# Altium PCB cs301_11_ref.PcbDoc
Units mil, origin at the board's own origin, x right, y up, seen from the top; angles counter-clockwise.
Board outline 10825 x 6635 mil, 2 copper layers (Top Layer, Bottom Layer); 128 components, 84 nets, 391 pads, 0 vias.
Unrouted connection lines stored in the file: 249.
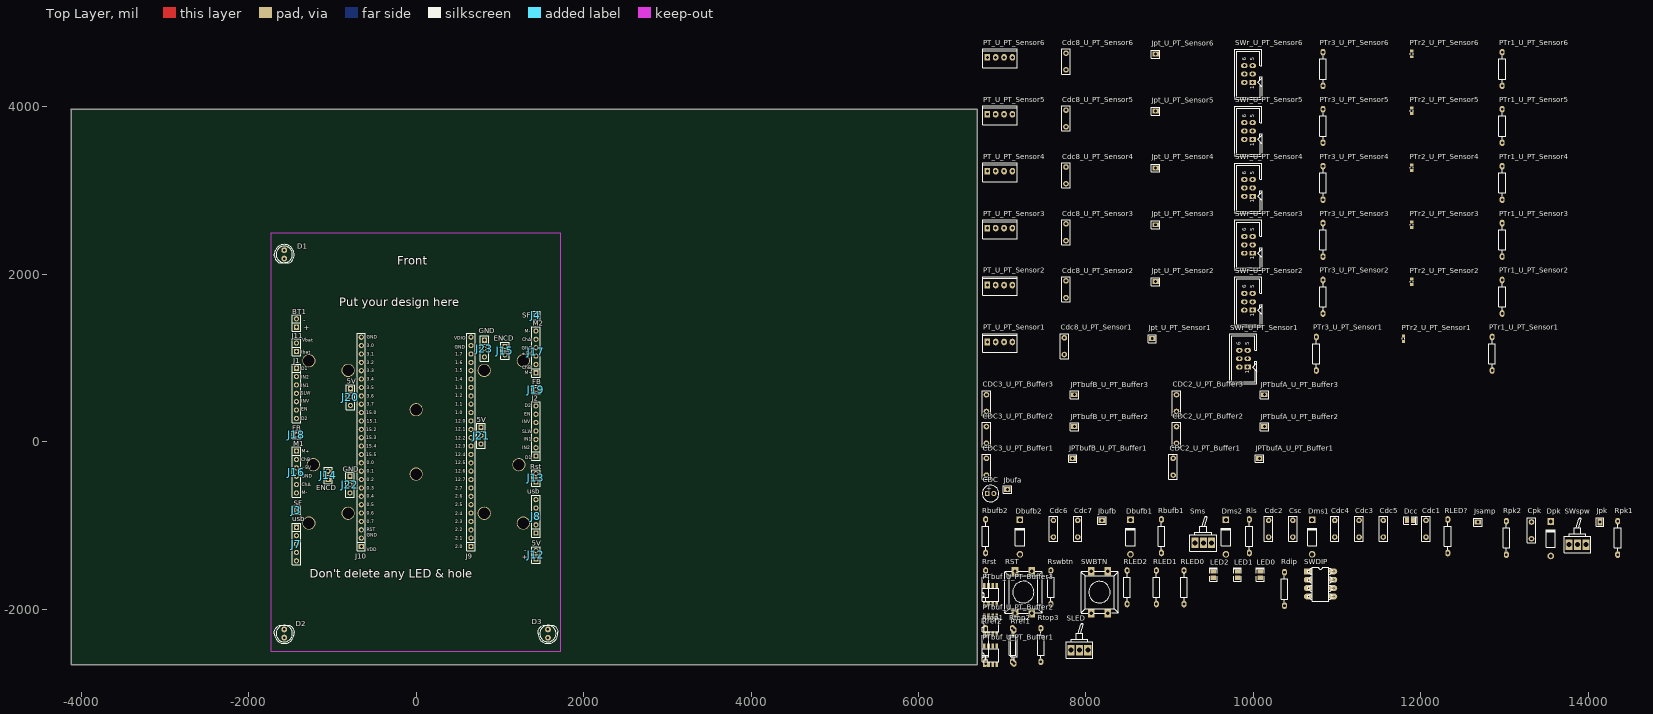
[diagram p0: Top Layer view]
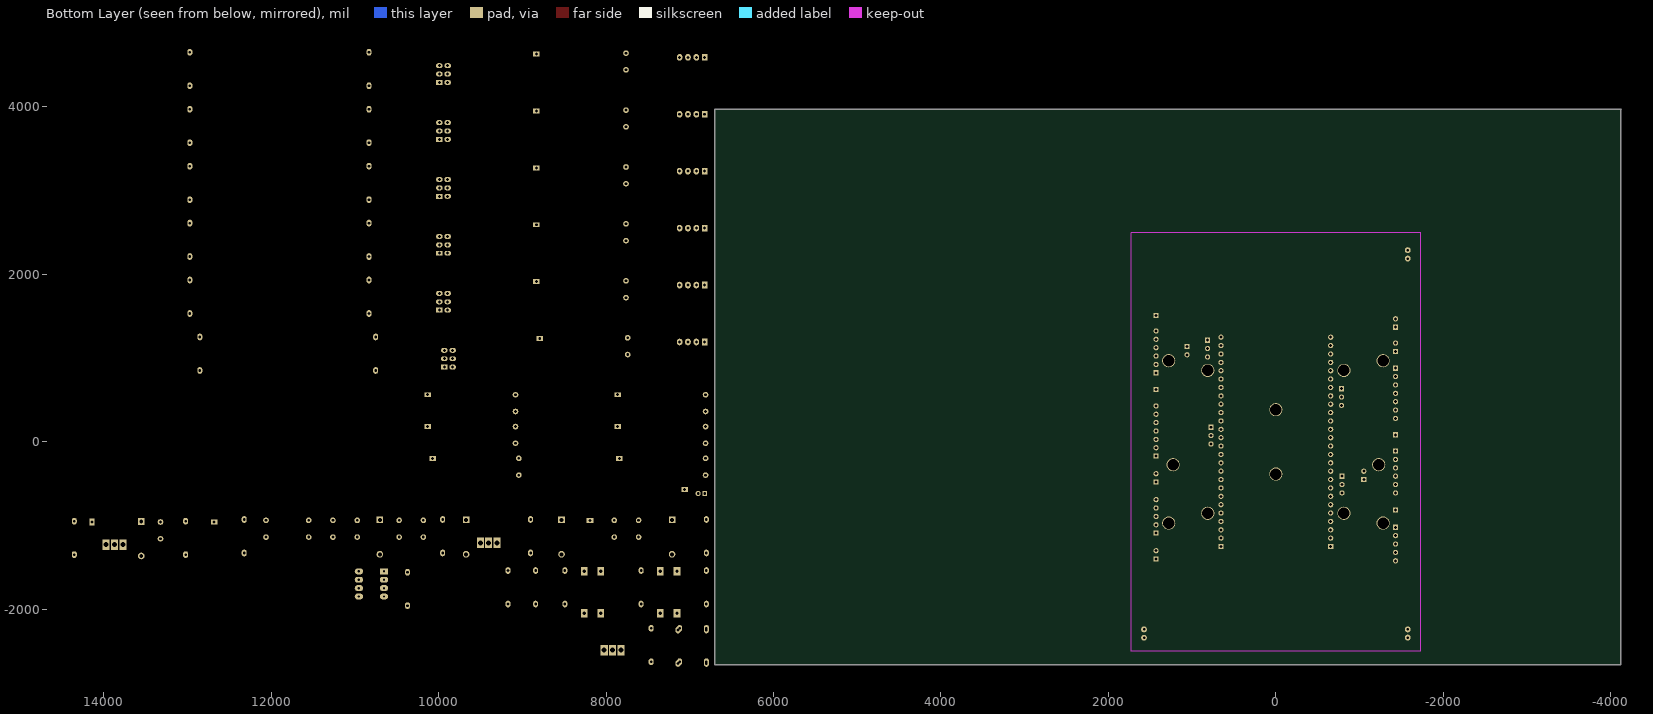
[diagram p1: Bottom Layer view, seen from below]

## Layer stack, top to bottom
Top Solder: solder mask 0.4, Solder Resist, Dk 3.5
Top Layer: signal copper 1.4
Dielectric1: dielectric 12.6, FR-4, Dk 4.8
Bottom Layer: signal copper 1.4
Bottom Solder: solder mask 0.4, Solder Resist, Dk 3.5

## Board outline
-4118.11,-2656.69 -4113.11,-2661.69 6701.89,-2661.69 6701.89,3973.31 -4123.11,3973.31 -4118.11,3968.31 -4118.11,-2656.69

## Design rules (kind name [scope] priority, off if disabled: settings)
Clearance [All] p1: gap=10
PolygonConnect [All] p1: connectstyle=Relief reliefconductorwidth=20 reliefentries=4 polygonreliefangle="90 Angle" airgapwidth=10
RoomDefinition U_Vref_2v5 [InComponentClass('U_Vref_2v5')] p1: confinementstyle=ConfineIn formatcopy=TRUE lockcomponents=FALSE outline 6751.89,-726.69 7311.89,-726.69 7311.89,-406.69 6751.89,-406.69
RoomDefinition U_Sensors [InComponentClass('U_Sensors')] p2: confinementstyle=ConfineIn formatcopy=TRUE lockcomponents=FALSE outline 6741.89,-1416.69 14531.89,-1416.69 14531.89,-776.69 6741.89,-776.69
RoomDefinition U_PT_Sensor6 [InComponentClass('U_PT_Sensor6')] p3: confinementstyle=ConfineIn formatcopy=TRUE lockcomponents=FALSE outline 6751.89,4083.31 13941.89,4083.31 13941.89,4813.31 6751.89,4813.31
RoomDefinition U_PT_Sensor5 [InComponentClass('U_PT_Sensor5')] p4: confinementstyle=ConfineIn formatcopy=TRUE lockcomponents=FALSE outline 6751.89,3403.31 13941.89,3403.31 13941.89,4133.31 6751.89,4133.31
RoomDefinition U_PT_Sensor4 [InComponentClass('U_PT_Sensor4')] p5: confinementstyle=ConfineIn formatcopy=TRUE lockcomponents=FALSE outline 6751.89,2723.31 13941.89,2723.31 13941.89,3453.31 6751.89,3453.31
RoomDefinition U_PT_Sensor3 [InComponentClass('U_PT_Sensor3')] p6: confinementstyle=ConfineIn formatcopy=TRUE lockcomponents=FALSE outline 6751.89,2043.31 13941.89,2043.31 13941.89,2773.31 6751.89,2773.31
RoomDefinition U_PT_Sensor2 [InComponentClass('U_PT_Sensor2')] p7: confinementstyle=ConfineIn formatcopy=TRUE lockcomponents=FALSE outline 6751.89,1363.31 13941.89,1363.31 13941.89,2093.31 6751.89,2093.31
RoomDefinition U_PT_Sensor1 [InComponentClass('U_PT_Sensor1')] p8: confinementstyle=ConfineIn formatcopy=TRUE lockcomponents=FALSE outline 6751.89,683.31 13801.89,683.31 13801.89,1413.31 6751.89,1413.31
RoomDefinition U_PT_Buffer3 [InComponentClass('U_PT_Buffer3')] p9: confinementstyle=ConfineIn formatcopy=TRUE lockcomponents=FALSE outline 6751.89,303.31 11261.89,303.31 11261.89,733.31 6751.89,733.31
RoomDefinition U_PT_Buffer2 [InComponentClass('U_PT_Buffer2')] p10: confinementstyle=ConfineIn formatcopy=TRUE lockcomponents=FALSE outline 6751.89,-76.69 11261.89,-76.69 11261.89,353.31 6751.89,353.31
RoomDefinition U_PT_Buffer1 [InComponentClass('U_PT_Buffer1')] p11: confinementstyle=ConfineIn formatcopy=TRUE lockcomponents=FALSE outline 6751.89,-456.69 11181.89,-456.69 11181.89,-26.69 6751.89,-26.69
RoomDefinition U_Interface [InComponentClass('U_Interface')] p12: confinementstyle=ConfineIn formatcopy=TRUE lockcomponents=FALSE outline 6741.89,-2106.69 11011.89,-2106.69 11011.89,-1386.69 6741.89,-1386.69
RoomDefinition cs301_11 [InComponentClass('cs301_11')] p13: confinementstyle=ConfineIn formatcopy=TRUE lockcomponents=FALSE outline 6741.89,-2676.69 8091.89,-2676.69 8091.89,-2056.69 6741.89,-2056.69
RoutingVias [All] p1: holewidth=28 width=50 viastyle="Through Hole" minholewidth=28 minwidth=50 maxholewidth=28 maxwidth=50
SilkToSolderMaskClearance SilkscreenOverComponentPads [IsPad] p1: minsilkscreentomaskgap=10 clearancetoexposedcopper=TRUE
SolderMaskExpansion [All] p1: expansion=4
UnpouredPolygon [All] p1: allowunpoured=FALSE
Width [All] p1: maxlimit=30 minlimit=10 preferedwidth=10 minimp=50.000000 maximp=50.000000 favimp=50.000000
28 further rules are at their usual default settings.

## Classes and differential pairs
channel class PT_Sensor: U_PT_Sensor1 U_PT_Sensor2 U_PT_Sensor3 U_PT_Sensor4 U_PT_Sensor5 U_PT_Sensor6
channel class PT_Buffer: U_PT_Buffer1 U_PT_Buffer2 U_PT_Buffer3
net class SOB[1..3]: SOB1 SOB2 SOB3
net class SOA[1..3]: SOA1 SOA2 SOA3
net class PTS[1..6]: PTS1 PTS2 PTS3 PTS4 PTS5 PTS6
component class U_Vref_2v5: BUF CDC Jbufa Rref1 Rref2
component class U_Sensors: Cdc1 Cdc2 Cdc3 Cdc4 Cdc5 Cdc6 Cdc7 Cpk Csc Dbufb1 Dbufb2 Dcc Dms1 Dms2 Dpk Jbufb Jpk Jsamp Rbufb1 Rbufb2 RLED? Rls Rpk1 Rpk2 Sms SWspw
component class U_PT_Sensor6: Cdc8_U_PT_Sensor6 Jpt_U_PT_Sensor6 PT_U_PT_Sensor6 PTr1_U_PT_Sensor6 PTr2_U_PT_Sensor6 PTr3_U_PT_Sensor6 SWr_U_PT_Sensor6
component class U_PT_Sensor5: Cdc8_U_PT_Sensor5 Jpt_U_PT_Sensor5 PT_U_PT_Sensor5 PTr1_U_PT_Sensor5 PTr2_U_PT_Sensor5 PTr3_U_PT_Sensor5 SWr_U_PT_Sensor5
component class U_PT_Sensor4: Cdc8_U_PT_Sensor4 Jpt_U_PT_Sensor4 PT_U_PT_Sensor4 PTr1_U_PT_Sensor4 PTr2_U_PT_Sensor4 PTr3_U_PT_Sensor4 SWr_U_PT_Sensor4
component class U_PT_Sensor3: Cdc8_U_PT_Sensor3 Jpt_U_PT_Sensor3 PT_U_PT_Sensor3 PTr1_U_PT_Sensor3 PTr2_U_PT_Sensor3 PTr3_U_PT_Sensor3 SWr_U_PT_Sensor3
component class U_PT_Sensor2: Cdc8_U_PT_Sensor2 Jpt_U_PT_Sensor2 PT_U_PT_Sensor2 PTr1_U_PT_Sensor2 PTr2_U_PT_Sensor2 PTr3_U_PT_Sensor2 SWr_U_PT_Sensor2
component class U_PT_Sensor1: Cdc8_U_PT_Sensor1 Jpt_U_PT_Sensor1 PT_U_PT_Sensor1 PTr1_U_PT_Sensor1 PTr2_U_PT_Sensor1 PTr3_U_PT_Sensor1 SWr_U_PT_Sensor1
component class U_PT_Buffer3: CDC2_U_PT_Buffer3 CDC3_U_PT_Buffer3 JPTbufA_U_PT_Buffer3 JPTbufB_U_PT_Buffer3 PTbuf_U_PT_Buffer3
component class U_PT_Buffer2: CDC2_U_PT_Buffer2 CDC3_U_PT_Buffer2 JPTbufA_U_PT_Buffer2 JPTbufB_U_PT_Buffer2 PTbuf_U_PT_Buffer2
component class U_PT_Buffer1: CDC2_U_PT_Buffer1 CDC3_U_PT_Buffer1 JPTbufA_U_PT_Buffer1 JPTbufB_U_PT_Buffer1 PTbuf_U_PT_Buffer1
component class U_Interface: LED0 LED1 LED2 Rdip RLED0 RLED1 RLED2 Rrst RST Rswbtn SWBTN SWDIP

## Components (designator, comment, footprint, x,y, rotation, side; value= is the part's Value field where it differs from the comment)
BT1 "Battery" SIP2 -1430,1370 r90 top locked
CDC "10uF" ECE-CAPPR2-5X11TH 6821.89,-616.69 r0 top
Cdc1 "47nF" ECE-CAPR0.2x0.1TH 12061.89,-1136.69 r90 top
Cdc2 "47nF" ECE-CAPR0.2x0.1TH 10181.89,-1136.69 r90 top
CDC2_U_PT_Buffer1 "47nF" ECE-CAPR0.2x0.1TH 9041.89,-396.69 r90 top (schematic designator CDC2)
CDC2_U_PT_Buffer2 "47nF" ECE-CAPR0.2x0.1TH 9081.89,-16.69 r90 top (schematic designator CDC2)
CDC2_U_PT_Buffer3 "47nF" ECE-CAPR0.2x0.1TH 9081.89,363.31 r90 top (schematic designator CDC2)
Cdc3 "47nF" ECE-CAPR0.2x0.1TH 11261.89,-1136.69 r90 top
CDC3_U_PT_Buffer1 "47nF" ECE-CAPR0.2x0.1TH 6811.89,-396.69 r90 top (schematic designator CDC3)
CDC3_U_PT_Buffer2 "47nF" ECE-CAPR0.2x0.1TH 6811.89,-16.69 r90 top (schematic designator CDC3)
CDC3_U_PT_Buffer3 "47nF" ECE-CAPR0.2x0.1TH 6811.89,363.31 r90 top (schematic designator CDC3)
Cdc4 "100nF" ECE-CAPR0.2x0.1TH 10971.89,-1136.69 r90 top
Cdc5 "100nF" ECE-CAPR0.2x0.1TH 11551.89,-1136.69 r90 top
Cdc6 "100nF" ECE-CAPR0.2x0.1TH 7611.89,-1136.69 r90 top
Cdc7 "100nF" ECE-CAPR0.2x0.1TH 7901.89,-1136.69 r90 top
Cdc8_U_PT_Sensor1 "47nF" ECE-CAPR0.2x0.1TH 7741.89,1043.31 r90 top (schematic designator Cdc8)
Cdc8_U_PT_Sensor2 "47nF" ECE-CAPR0.2x0.1TH 7761.89,1723.31 r90 top (schematic designator Cdc8)
Cdc8_U_PT_Sensor3 "47nF" ECE-CAPR0.2x0.1TH 7761.89,2403.31 r90 top (schematic designator Cdc8)
Cdc8_U_PT_Sensor4 "47nF" ECE-CAPR0.2x0.1TH 7761.89,3083.31 r90 top (schematic designator Cdc8)
Cdc8_U_PT_Sensor5 "47nF" ECE-CAPR0.2x0.1TH 7761.89,3763.31 r90 top (schematic designator Cdc8)
Cdc8_U_PT_Sensor6 "47nF" ECE-CAPR0.2x0.1TH 7761.89,4443.31 r90 top (schematic designator Cdc8)
Cpk "1uF" ECE-CAPR0.2x0.1TH 13321.89,-1156.69 r90 top
Csc "1uF" ECE-CAPR0.2x0.1TH 10471.89,-1136.69 r90 top
D1 "LED" LED0.1/5MM#1 -1574.8,2189.76 r180 top locked
D2 "LED" LED0.1/5MM#2 -1574.8,-2239.37 r0 top locked
D3 "LED" LED0.1/5MM#1 1574.8,-2239.37 r0 top locked
Dbufb1 "1N4148" ECE-DIO10.46-5.3x2.8TH 8531.89,-1136.69 r90 top
Dbufb2 "1N4148" ECE-DIO10.46-5.3x2.8TH 7211.89,-1136.69 r90 top
Dcc "LTST-C170KAKT" ECE-LED2012-0805SM 11871.89,-936.69 r0 top
Dms1 "1N4148" ECE-DIO10.46-5.3x2.8TH 10701.89,-1136.69 r90 top
Dms2 "1N4148" ECE-DIO10.46-5.3x2.8TH 9671.89,-1136.69 r90 top
Dpk "1N4148" ECE-DIO10.46-5.3x2.8TH 13551.89,-1156.69 r90 top
J1 "CON7" SIP7 -1430,880 r270 top locked
J2 "CON7" SIP7 1430,-170 r90 top locked
J3 "SF" SIP1/0.6 -1430,-815 r270 top locked
J4 "SF" SIP1/0.6 1430,1510 r180 top locked
J7 "usb" SIP5 -1430,-1020 r270 top locked
J8 "usb" SIP5 1430,-1090 r90 top locked
J9 "26PIN" SIP26 655,-1250 r90 top locked
J10 "26PIN" SIP26 -655,-1250 r90 top locked
J11 "Battery" sip2 -1430,1080 r90 top locked
J12 "5V" sip2 1430,-1400 r90 top locked
J13 "Rst" sip2 1430,-480 r90 top locked
J14 "ENCD" sip2 -1050,-450 r90 top locked
J15 "ENCD" sip2 1060,1140 r270 top locked
J16 "M1" sip6 -1430,-110 r270 top locked
J17 "M2" sip6 1430,825 r90 top locked
J18 "FB" SIP1/0.6 -1430,85 r0 top locked
J19 "FB" SIP1/0.6 1430,625 r0 top locked
J20 "5V" sip3 -785,635 r270 top locked
J21 "5V" sip3 775,175 r270 top locked
J22 "GND" sip3 -790,-410 r270 top locked
J23 "GND" sip3 815,1215 r270 top locked
Jbufa "TEST PIN" ECE-HDR1TH 7061.89,-566.69 r90 top
Jbufb "TEST PIN" ECE-HDR1TH 8191.89,-936.69 r90 top
Jpk "TEST PIN" ECE-HDR1TH 14141.89,-956.69 r0 top
Jpt_U_PT_Sensor1 "TEST PIN" ECE-HDR1TH 8791.89,1233.31 r90 top (schematic designator Jpt)
Jpt_U_PT_Sensor2 "TEST PIN" ECE-HDR1TH 8831.89,1913.31 r90 top (schematic designator Jpt)
Jpt_U_PT_Sensor3 "TEST PIN" ECE-HDR1TH 8831.89,2593.31 r90 top (schematic designator Jpt)
Jpt_U_PT_Sensor4 "TEST PIN" ECE-HDR1TH 8831.89,3273.31 r90 top (schematic designator Jpt)
Jpt_U_PT_Sensor5 "TEST PIN" ECE-HDR1TH 8831.89,3953.31 r90 top (schematic designator Jpt)
Jpt_U_PT_Sensor6 "TEST PIN" ECE-HDR1TH 8831.89,4633.31 r90 top (schematic designator Jpt)
JPTbufA_U_PT_Buffer1 "TEST PIN" ECE-HDR1TH 10071.89,-196.69 r90 top (schematic designator JPTbufA)
JPTbufA_U_PT_Buffer2 "TEST PIN" ECE-HDR1TH 10131.89,183.31 r90 top (schematic designator JPTbufA)
JPTbufA_U_PT_Buffer3 "TEST PIN" ECE-HDR1TH 10131.89,563.31 r90 top (schematic designator JPTbufA)
JPTbufB_U_PT_Buffer1 "TEST PIN" ECE-HDR1TH 7841.89,-196.69 r90 top (schematic designator JPTbufB)
JPTbufB_U_PT_Buffer2 "TEST PIN" ECE-HDR1TH 7861.89,183.31 r90 top (schematic designator JPTbufB)
JPTbufB_U_PT_Buffer3 "TEST PIN" ECE-HDR1TH 7861.89,563.31 r90 top (schematic designator JPTbufB)
Jsamp "TEST PIN" ECE-HDR1TH 12681.89,-956.69 r90 top
LED0 "LTST-C170KGKT" ECE-LED2012-0805SM 10081.89,-1586.69 r90 top
LED1 "LTST-C170KAKT" ECE-LED2012-0805SM 9811.89,-1586.69 r90 top
LED2 "LTST-C170KAKT" ECE-LED2012-0805SM 9521.89,-1586.69 r90 top
PT_U_PT_Sensor1 "4 Way" ECE-600104STTH 6821.89,1193.31 r90 top (schematic designator PT)
PT_U_PT_Sensor2 "4 Way" ECE-600104STTH 6821.89,1873.31 r90 top (schematic designator PT)
PT_U_PT_Sensor3 "4 Way" ECE-600104STTH 6821.89,2553.31 r90 top (schematic designator PT)
PT_U_PT_Sensor4 "4 Way" ECE-600104STTH 6821.89,3233.31 r90 top (schematic designator PT)
PT_U_PT_Sensor5 "4 Way" ECE-600104STTH 6821.89,3913.31 r90 top (schematic designator PT)
PT_U_PT_Sensor6 "4 Way" ECE-600104STTH 6821.89,4593.31 r90 top (schematic designator PT)
PTbuf_U_PT_Buffer1 "LT6221" ECE-SO8 6861.89,-2546.69 r90 top (schematic designator PTbuf)
PTbuf_U_PT_Buffer2 "LT6221" ECE-SO8 6861.89,-2186.69 r90 top (schematic designator PTbuf)
PTbuf_U_PT_Buffer3 "LT6221" ECE-SO8 6861.89,-1826.69 r90 top (schematic designator PTbuf)
PTr1_U_PT_Sensor1 "39K" ECE-RESA0.4TH 12851.89,853.31 r90 top (schematic designator PTr1)
PTr1_U_PT_Sensor2 "39K" ECE-RESA0.4TH 12971.89,1533.31 r90 top (schematic designator PTr1)
PTr1_U_PT_Sensor3 "39K" ECE-RESA0.4TH 12971.89,2213.31 r90 top (schematic designator PTr1)
PTr1_U_PT_Sensor4 "39K" ECE-RESA0.4TH 12971.89,2893.31 r90 top (schematic designator PTr1)
PTr1_U_PT_Sensor5 "39K" ECE-RESA0.4TH 12971.89,3573.31 r90 top (schematic designator PTr1)
PTr1_U_PT_Sensor6 "39K" ECE-RESA0.4TH 12971.89,4253.31 r90 top (schematic designator PTr1)
PTr2_U_PT_Sensor1 "10K" ECE-RESC1608-0603SM 11791.89,1233.31 r90 top (schematic designator PTr2)
PTr2_U_PT_Sensor2 "10K" ECE-RESC1608-0603SM 11891.89,1913.31 r90 top (schematic designator PTr2)
PTr2_U_PT_Sensor3 "10K" ECE-RESC1608-0603SM 11891.89,2593.31 r90 top (schematic designator PTr2)
PTr2_U_PT_Sensor4 "10K" ECE-RESC1608-0603SM 11891.89,3273.31 r90 top (schematic designator PTr2)
PTr2_U_PT_Sensor5 "10K" ECE-RESC1608-0603SM 11891.89,3953.31 r90 top (schematic designator PTr2)
PTr2_U_PT_Sensor6 "10K" ECE-RESC1608-0603SM 11891.89,4633.31 r90 top (schematic designator PTr2)
PTr3_U_PT_Sensor1 "27K" ECE-RESA0.4TH 10751.89,853.31 r90 top (schematic designator PTr3)
PTr3_U_PT_Sensor2 "27K" ECE-RESA0.4TH 10831.89,1533.31 r90 top (schematic designator PTr3)
PTr3_U_PT_Sensor3 "27K" ECE-RESA0.4TH 10831.89,2213.31 r90 top (schematic designator PTr3)
PTr3_U_PT_Sensor4 "27K" ECE-RESA0.4TH 10831.89,2893.31 r90 top (schematic designator PTr3)
PTr3_U_PT_Sensor5 "27K" ECE-RESA0.4TH 10831.89,3573.31 r90 top (schematic designator PTr3)
PTr3_U_PT_Sensor6 "27K" ECE-RESA0.4TH 10831.89,4253.31 r90 top (schematic designator PTr3)
Rbufb1 "47K" ECE-RESA0.4TH 8901.89,-1326.69 r90 top
Rbufb2 "56K" ECE-RESA0.4TH 6801.89,-1326.69 r90 top
Rdip "1K" ECE-RESA0.4TH 10371.89,-1956.69 r90 top
RLED0 "270R" ECE-RESA0.4TH 9171.89,-1936.69 r90 top
RLED1 "270R" ECE-RESA0.4TH 8841.89,-1936.69 r90 top
RLED2 "270R" ECE-RESA0.4TH 8491.89,-1936.69 r90 top
RLED? "270R" ECE-RESA0.4TH 12321.89,-1326.69 r90 top
Rls "4K7" ECE-RESA0.4TH 9951.89,-1326.69 r90 top
Rpk1 "220R" ECE-RESA0.4TH 14351.89,-1346.69 r90 top
Rpk2 "220K" ECE-RESA0.4TH 13021.89,-1346.69 r90 top
Rref1 "47K" ECE-RESA0.4TH 7141.89,-2646.69 r90 top
Rref2 "47K" ECE-RESA0.4TH 6801.89,-2646.69 r90 top
Rrst "1K" ECE-RESA0.4TH 6801.89,-1936.69 r90 top
RST "SW-PB" SW-PB 7131.89,-1946.69 r90 top
Rswbtn "1K" ECE-RESA0.4TH 7581.89,-1936.69 r90 top
Rtop1 "270R" ECE-RESA0.4TH 6801.89,-2626.69 r90 top
Rtop2 "270R" ECE-RESA0.4TH 7121.89,-2626.69 r90 top
Rtop3 "270R" ECE-RESA0.4TH 7461.89,-2626.69 r90 top
SLED "SW-SPDT" SW-SPDT 7821.89,-2486.69 r0 top
Sms "SW-SPDT" SW-SPDT 9301.89,-1206.69 r0 top
SWBTN "SW-PB" SW-PB 8041.89,-1946.69 r90 top
SWDIP "*" ECE-DIP8 10651.89,-1546.69 r0 top
SWr_U_PT_Sensor1 "Header 3X2" ECE-BHDR2X3 9931.89,893.31 r90 top (schematic designator SWr)
SWr_U_PT_Sensor2 "Header 3X2" ECE-BHDR2X3 9991.89,1573.31 r90 top (schematic designator SWr)
SWr_U_PT_Sensor3 "Header 3X2" ECE-BHDR2X3 9991.89,2253.31 r90 top (schematic designator SWr)
SWr_U_PT_Sensor4 "Header 3X2" ECE-BHDR2X3 9991.89,2933.31 r90 top (schematic designator SWr)
SWr_U_PT_Sensor5 "Header 3X2" ECE-BHDR2X3 9991.89,3613.31 r90 top (schematic designator SWr)
SWr_U_PT_Sensor6 "Header 3X2" ECE-BHDR2X3 9991.89,4293.31 r90 top (schematic designator SWr)
SWspw "SW-SPDT" SW-SPDT 13771.89,-1226.69 r0 top

## Footprints (in the part's own frame and the unit in brackets; to place one, negate y for a bottom-side part, rotate by r counter-clockwise, add the part's x,y. Pads: shape width x height; smd on the part's side, far side on the other; paste and mask are expansions set on the pad)
ECE-600104STTH [mm] "Polarised Header 4 way"
  rect 2x1.7 hole 0.9: 1(0,0)
  oval 2x1.7 hole 0.9: 2(0,-2.54) 3(0,-5.08) 4(0,-7.62)
  silkscreen extent -3.16,-9.04 2.54,1.42
ECE-BHDR2X3 [mm]
  rect 1.5x2 hole 0.9: 1(0,0)
  oval 1.5x2 hole 0.9 paste+0: 2(0,2.54)
  oval 1.5x2 hole 0.9: 3(2.54,0) 4(2.54,2.54) 5(5.08,0) 6(5.08,2.54)
  silkscreen extent -5.1,-2.82 10.1,5.45
ECE-CAPPR2-5X11TH [mm] "Polarised Radial Cap Dia 5mm"
  rect 1.45x1.6 hole 0.8: 1(0,0)
  oval 1.45x1.6 hole 0.8: 2(2,0)
  silkscreen extent -1.5,-2.5 3.5,2.5, body extent -1.51,-2.51 3.51,2.51, height 11.43
ECE-CAPR0.2x0.1TH [mm] "Radial non polarised Capacitor"
  round 1.7 hole 0.8: 1(0,0) 2(5.08,0)
  silkscreen extent -1.27,-1.27 6.35,1.27
ECE-DIO10.46-5.3x2.8TH [mm] "Diode, Axial; Body 5.2 x 2.7 mm (LxDia. max), Lead Dia. 0.86 mm (max)"
  round 2 hole 1.2: 1(-5.23,0)
  rect 2x2 hole 1.2: 2(5.23,0)
  silkscreen extent -2.65,-1.4 2.75,1.4
ECE-DIP8 [mil]
  rect 100x70 hole 28: 1(0,0)
  oval 100x70 hole 28: 2(0,-100) 3(0,-200) 4(0,-300) 5(300,-300) 6(300,-200) 7(300,-100) 8(300,0)
  silkscreen extent 0,-357 300,50
ECE-HDR1TH [mm] "Test Pin"
  rect 1.5x2 hole 0.9: 1(0,0)
  silkscreen extent -1.25,-1.29 1.15,1.25
ECE-LED2012-0805SM [mm] "RED AS AlGaAs SMD LED, Body; 2mm x 1.25 mm (LxW)"
  rect 1.3x1.6 smd: 1(-0.95,0) 2(0.95,0)
  silkscreen extent -2,-1.15 2.13,1.15
ECE-RESA0.4TH [mil] "Resistor Axial 10mm"
  oval 80x60 hole 31.5: 1(0.16,0.31) 2(400.16,0.31)
  silkscreen extent 40,-40 360,40, body extent -7,-47 417,47, height 95
ECE-RESC1608-0603SM [mm] "Chip Resistor, Body 1.6x0.8mm, IPC Medium Density"
  rect 0.9x1 smd: 1(-0.85,0) 2(0.85,0)
  silkscreen extent -0.2,-0.4 0.2,0.4, body extent -0.85,-0.48 0.85,0.48, height 0.6
ECE-SO8 [mm] "8-Lead Plastic Small Outline, 1.27mm pitch"
  rect 1.5x0.8 smd: 1(-2.8,1.905) 2(-2.8,0.635) 3(-2.8,-0.635) 4(-2.8,-1.9) 5(2.8,-1.905) 6(2.8,-0.635) 7(2.8,0.635) 8(2.8,1.905)
  silkscreen extent -2,-2.5 2,2.5, body extent -3,-2.45 3,2.45, height 1.7
LED0.1/5MM#1 [mil]
  round 70 hole 30: A(0,0) K(0,-100)
  silkscreen extent -118,-168 118,50
LED0.1/5MM#2 [mil]
  round 70 hole 30: A(0,0) K(0,-98.43)
  silkscreen extent -118,-168 118,50
SIP1/0.6 [mil]
  rect 62x62 hole 35.43: 1(0,0)
  silkscreen extent -50,-50 50,50
SIP2 [mil]
  rect 62x62 hole 35.43: 1(0,0)
  round 62 hole 35.43: 2(100,0)
  silkscreen extent -50,-50 150,50
sip2 [mil]
  rect 62x62 hole 35.43: 1(0,0)
  round 62 hole 35.43: 2(100,0)
  silkscreen extent -50,-50 150,50
sip3 [mil]
  rect 62x62 hole 35.43: 1(0,0)
  round 62 hole 35.43: 2(100,0) 3(200,0)
  silkscreen extent -50,-50 250,50
SIP5 [mil]
  rect 62x62 hole 35.43: 1(0,0)
  round 62 hole 35.43: 2(100,0) 3(200,0) 4(300,0) 5(400,0)
  silkscreen extent -50,-50 450,50
sip6 [mil]
  rect 62x62 hole 35.43: 1(0,0)
  round 62 hole 35.43: 2(100,0) 3(200,0) 4(300,0) 5(400,0) 6(500,0)
  silkscreen extent -50,-50 550,50
SIP7 [mil]
  rect 62x62 hole 35.43: 1(0,0)
  round 62 hole 35.43: 2(100,0) 3(200,0) 4(300,0) 5(400,0) 6(500,0) 7(600,0)
  silkscreen extent -50,-50 650,50
SIP26 [mil]
  rect 62x62 hole 35.43: 1(0,0)
  round 62 hole 35.43: 2(100,0) 3(200,0) 4(300,0) 5(400,0) 6(500,0) 7(600,0) 8(700,0) 9(800,0) 10(900,0) 11(1000,0) 12(1100,0) 13(1200,0) 14(1300,0) 15(1400,0) 16(1500,0) 17(1600,0) 18(1700,0) 19(1800,0) 20(1900,0) 21(2000,0) 22(2100,0) 23(2200,0) 24(2300,0) 25(2400,0) 26(2500,0)
  silkscreen extent -50,-50 2550,50
SW-PB [mil]
  rect 100x80 hole 40: 1(-100,-20) 1(400,-20) 2(-100,-220) 2(400,-220)
  silkscreen extent -100,-345 400,100
SW-SPDT [mil]
  rect 85x125 hole 60: 1(0,0) 2(100,0) 3(200,0)
  silkscreen extent -60,-100 260,315

## Part data
BT1 J11 J12 J13 J14 J15: library part CON2, "Connector"
CDC: library part CAP000211, "CAP ELEC 10uF 25V TH"
Cdc1 Cdc2 CDC2_U_PT_Buffer1 CDC2_U_PT_Buffer2 CDC2_U_PT_Buffer3 Cdc3 CDC3_U_PT_Buffer1 CDC3_U_PT_Buffer2 CDC3_U_PT_Buffer3 Cdc8_U_PT_Sensor1 Cdc8_U_PT_Sensor2 Cdc8_U_PT_Sensor3 Cdc8_U_PT_Sensor4 Cdc8_U_PT_Sensor5 Cdc8_U_PT_Sensor6: library part CAP000045, "CAP CER 47nF 50V TH"
Cdc4 Cdc5 Cdc6 Cdc7: library part CAP000125, "CAP MKT 100nF 100V TH"
Cpk Csc: library part CAP000062, "CAP MONO 1uF 50V TH"
Dbufb1 Dbufb2 Dms1 Dms2 Dpk: library part DIO000005, "Small Signal Diode 2A 100V TH"
Dcc LED1 LED2: library part DIO000105, "LED RED ORANGE CLEAR 0805 SMD"
J1 J2: "Connector"
J3 J4 J18 J19: library part CON1, "Connector"
J7 J8: library part CON5, "Connector"
J16 J17: library part CON6, "Connector"
J20 J21 J22 J23: library part CON3, "Connector"
Jbufa Jbufb Jpk Jpt_U_PT_Sensor1 Jpt_U_PT_Sensor2 Jpt_U_PT_Sensor3 Jpt_U_PT_Sensor4 Jpt_U_PT_Sensor5 Jpt_U_PT_Sensor6 JPTbufA_U_PT_Buffer1 JPTbufA_U_PT_Buffer2 JPTbufA_U_PT_Buffer3 JPTbufB_U_PT_Buffer1 JPTbufB_U_PT_Buffer2 JPTbufB_U_PT_Buffer3 Jsamp: library part CON000017
LED0: library part DIO000104, "LED GREEN CLEAR 0805 SM"
PT_U_PT_Sensor1 PT_U_PT_Sensor2 PT_U_PT_Sensor3 PT_U_PT_Sensor4 PT_U_PT_Sensor5 PT_U_PT_Sensor6: library part CON000003, "HEADER POLARISED 4WAY TH"
PTbuf_U_PT_Buffer1 PTbuf_U_PT_Buffer2 PTbuf_U_PT_Buffer3: library part OPA000102, "IC OPAMP LT6221 DUAL SM"
PTr1_U_PT_Sensor1 PTr1_U_PT_Sensor2 PTr1_U_PT_Sensor3 PTr1_U_PT_Sensor4 PTr1_U_PT_Sensor5 PTr1_U_PT_Sensor6: library part RES000056, "RES MF 39K TH"
PTr2_U_PT_Sensor1 PTr2_U_PT_Sensor2 PTr2_U_PT_Sensor3 PTr2_U_PT_Sensor4 PTr2_U_PT_Sensor5 PTr2_U_PT_Sensor6: library part RES000150, "RES CER 10K 1608 SM"
PTr3_U_PT_Sensor1 PTr3_U_PT_Sensor2 PTr3_U_PT_Sensor3 PTr3_U_PT_Sensor4 PTr3_U_PT_Sensor5 PTr3_U_PT_Sensor6: library part RES000054, "RES MF 27K TH"
Rbufb1 Rref1 Rref2: library part RES000057, "RES MF 47K TH"
Rbufb2: library part RES000058, "RES MF 56K TH"
Rdip Rrst Rswbtn: library part RES000037, "RES MF 1K0 TH"
RLED0 RLED1 RLED2 RLED? Rtop1 Rtop2 Rtop3: library part RES000030, "RES MF 270R TH"
Rls: library part RES000045, "RES MF 4K7 TH"
Rpk1: library part RES000029, "RES MF 220R TH"
Rpk2: library part RES000065, "RES MF 220K TH"
RST SWBTN: "Push Button Switch"
SLED Sms SWspw: "Toggle Switch"
SWDIP: library part Switch-DIP8

## Free pads (board coordinates)
  round 157.48 hole 137.8 unplated: 0(-1280,-970) 0(-1280,970) 0(-1228,-272) 0(0,-385) 0(0,385) 0(1228,-272) 0(1280,-970) 0(1280,970) 1(-813,-853) 1(-813,853) 1(813,-853) 1(813,853)

## Nets (pads, with @x,y where several pads share a name; then routed paths per layer and width w, separated by ;. In a path a pad name is that pad's centre, name@x,y a point inside that pad or via, vN(x,y) a via of type N, cw(c..) or ccw(c..) an arc to the next point about the centre after c; other vN are vias at no path point)
AGND: Cdc1.2 Cdc2.2 CDC2_U_PT_Buffer1.2 CDC2_U_PT_Buffer2.2 CDC2_U_PT_Buffer3.2 Cdc3.2 CDC3_U_PT_Buffer1.2 CDC3_U_PT_Buffer2.2 CDC3_U_PT_Buffer3.2 Cdc4.2 Cdc5.2 Cdc6.2 Cdc7.2 Cdc8_U_PT_Sensor1.2 Cdc8_U_PT_Sensor2.2 Cdc8_U_PT_Sensor3.2 Cdc8_U_PT_Sensor4.2 Cdc8_U_PT_Sensor5.2 Cdc8_U_PT_Sensor6.2 CDC.2 Cpk.2 Dbufb2.1 Dcc.2 Dms2.1 J22.1 J23.1 PT_U_PT_Sensor1.2 PT_U_PT_Sensor1.3 PT_U_PT_Sensor1.4 PT_U_PT_Sensor2.2 PT_U_PT_Sensor2.3 PT_U_PT_Sensor2.4 PT_U_PT_Sensor3.2 PT_U_PT_Sensor3.3 PT_U_PT_Sensor3.4 PT_U_PT_Sensor4.2 PT_U_PT_Sensor4.3 PT_U_PT_Sensor4.4 PT_U_PT_Sensor5.2 PT_U_PT_Sensor5.3 PT_U_PT_Sensor5.4 PT_U_PT_Sensor6.2 PT_U_PT_Sensor6.3 PT_U_PT_Sensor6.4 PTbuf_U_PT_Buffer1.4 PTbuf_U_PT_Buffer2.4 PTbuf_U_PT_Buffer3.4 Rbufb2.1 Rpk2.1 Rref2.1 Rtop1.1 Rtop2.1 Rtop3.1 SLED.3 SWspw.3
D11: J1.1 J10.20
D21: J2.1 J10.21
DGND: J1.4 J2.4 J13.1 J22.3 J23.3 Rdip.1 RLED0.1 RLED1.1 RLED2.1 RST.1 SWBTN.1
IAMPIN: Cdc5.1 J10.22 J11.1
IAMPOUT: Cdc4.1 J9.5 J10.18
IN11: J1.3 J10.14
IN12: J1.2 J10.15
IN21: J2.3 J10.12
IN22: J2.2 J10.13
LED0: J9.2 LED0.1
LED1: J9.10 LED1.1
LED2: J9.11 LED2.1
NetBUF_3: Rref1.1 Rref2.2
NetBUF_5: Cdc6.1 Dbufb1.1 Dbufb2.2 Jbufb.1 Rbufb1.1 Rbufb2.2
NetD1_A: D1.A D2.A D3.A SLED.2
NetD1_K: D1.K Rtop1.2
NetD2_K: D2.K Rtop2.2
NetD3_K: D3.K Rtop3.2
NetDcc_1: Dcc.1 RLED?.1
NetLED0_2: LED0.2 RLED0.2
NetLED1_2: LED1.2 RLED1.2
NetLED2_2: LED2.2 RLED2.2
NetPTr1_U_PT_Sensor1_1: PTr1_U_PT_Sensor1.1 SWr_U_PT_Sensor1.2
NetPTr1_U_PT_Sensor2_1: PTr1_U_PT_Sensor2.1 SWr_U_PT_Sensor2.2
NetPTr1_U_PT_Sensor3_1: PTr1_U_PT_Sensor3.1 SWr_U_PT_Sensor3.2
NetPTr1_U_PT_Sensor4_1: PTr1_U_PT_Sensor4.1 SWr_U_PT_Sensor4.2
NetPTr1_U_PT_Sensor5_1: PTr1_U_PT_Sensor5.1 SWr_U_PT_Sensor5.2
NetPTr1_U_PT_Sensor6_1: PTr1_U_PT_Sensor6.1 SWr_U_PT_Sensor6.2
NetPTr2_U_PT_Sensor1_1: PTr2_U_PT_Sensor1.1 SWr_U_PT_Sensor1.6
NetPTr2_U_PT_Sensor2_1: PTr2_U_PT_Sensor2.1 SWr_U_PT_Sensor2.6
NetPTr2_U_PT_Sensor3_1: PTr2_U_PT_Sensor3.1 SWr_U_PT_Sensor3.6
NetPTr2_U_PT_Sensor4_1: PTr2_U_PT_Sensor4.1 SWr_U_PT_Sensor4.6
NetPTr2_U_PT_Sensor5_1: PTr2_U_PT_Sensor5.1 SWr_U_PT_Sensor5.6
NetPTr2_U_PT_Sensor6_1: PTr2_U_PT_Sensor6.1 SWr_U_PT_Sensor6.6
NetPTr3_U_PT_Sensor1_1: PTr3_U_PT_Sensor1.1 SWr_U_PT_Sensor1.4
NetPTr3_U_PT_Sensor2_1: PTr3_U_PT_Sensor2.1 SWr_U_PT_Sensor2.4
NetPTr3_U_PT_Sensor3_1: PTr3_U_PT_Sensor3.1 SWr_U_PT_Sensor3.4
NetPTr3_U_PT_Sensor4_1: PTr3_U_PT_Sensor4.1 SWr_U_PT_Sensor4.4
NetPTr3_U_PT_Sensor5_1: PTr3_U_PT_Sensor5.1 SWr_U_PT_Sensor5.4
NetPTr3_U_PT_Sensor6_1: PTr3_U_PT_Sensor6.1 SWr_U_PT_Sensor6.4
NetRdip_2: Rdip.2 SWDIP.1 SWDIP.2 SWDIP.3 SWDIP.4
NetRls_1: Rls.1 Sms.1
NetRrst_1: Rrst.1 RST.2
NetRswbtn_1: Rswbtn.1 SWBTN.2
PKAMPFB: Cpk.1 Dpk.2 J10.8 Jpk.1 Rpk1.1 Rpk2.2
PKAMPIN: Cdc1.1 Cdc3.1 J9.1 J9.7 J10.11 Jsamp.1
PKAMPOUT: Dpk.1 J10.10
PKDRAIN: J9.12 Rpk1.2
PTS1: Cdc8_U_PT_Sensor1.1 Jpt_U_PT_Sensor1.1 PT_U_PT_Sensor1.1 PTbuf_U_PT_Buffer1.3 SWr_U_PT_Sensor1.1 SWr_U_PT_Sensor1.3 SWr_U_PT_Sensor1.5
PTS2: Cdc8_U_PT_Sensor2.1 Jpt_U_PT_Sensor2.1 PT_U_PT_Sensor2.1 PTbuf_U_PT_Buffer2.3 SWr_U_PT_Sensor2.1 SWr_U_PT_Sensor2.3 SWr_U_PT_Sensor2.5
PTS3: Cdc8_U_PT_Sensor3.1 Jpt_U_PT_Sensor3.1 PT_U_PT_Sensor3.1 PTbuf_U_PT_Buffer3.3 SWr_U_PT_Sensor3.1 SWr_U_PT_Sensor3.3 SWr_U_PT_Sensor3.5
PTS4: Cdc8_U_PT_Sensor4.1 Jpt_U_PT_Sensor4.1 PT_U_PT_Sensor4.1 PTbuf_U_PT_Buffer1.5 SWr_U_PT_Sensor4.1 SWr_U_PT_Sensor4.3 SWr_U_PT_Sensor4.5
PTS5: Cdc8_U_PT_Sensor5.1 Jpt_U_PT_Sensor5.1 PT_U_PT_Sensor5.1 PTbuf_U_PT_Buffer2.5 SWr_U_PT_Sensor5.1 SWr_U_PT_Sensor5.3 SWr_U_PT_Sensor5.5
PTS6: Cdc8_U_PT_Sensor6.1 Jpt_U_PT_Sensor6.1 PT_U_PT_Sensor6.1 PTbuf_U_PT_Buffer3.5 SWr_U_PT_Sensor6.1 SWr_U_PT_Sensor6.3 SWr_U_PT_Sensor6.5
Q1A: J10.9 J14.1
Q1B: J10.23 J14.2
Q2A: J10.4 J15.1
Q2B: J10.5 J15.2
RESET: J10.3 J13.2 Rrst.2
SAMPIN: Cdc2.1 Csc.2 Dms1.1 Dms2.2 J9.4 Rls.2
SAR0: Cdc7.1 J9.6
SAR3: Csc.1 J9.8 J10.19
SOA1: CDC2_U_PT_Buffer1.1 J9.23 JPTbufA_U_PT_Buffer1.1 PTbuf_U_PT_Buffer1.1 PTbuf_U_PT_Buffer1.2
SOA2: CDC2_U_PT_Buffer2.1 J9.24 JPTbufA_U_PT_Buffer2.1 PTbuf_U_PT_Buffer2.1 PTbuf_U_PT_Buffer2.2
SOA3: CDC2_U_PT_Buffer3.1 J10.17 JPTbufA_U_PT_Buffer3.1 PTbuf_U_PT_Buffer3.1 PTbuf_U_PT_Buffer3.2
SOB1: CDC3_U_PT_Buffer1.1 J10.16 JPTbufB_U_PT_Buffer1.1 PTbuf_U_PT_Buffer1.6 PTbuf_U_PT_Buffer1.7
SOB2: CDC3_U_PT_Buffer2.1 J10.25 JPTbufB_U_PT_Buffer2.1 PTbuf_U_PT_Buffer2.6 PTbuf_U_PT_Buffer2.7
SOB3: CDC3_U_PT_Buffer3.1 J10.24 JPTbufB_U_PT_Buffer3.1 PTbuf_U_PT_Buffer3.6 PTbuf_U_PT_Buffer3.7
SWBTN: J9.3 Rswbtn.2
SWDIP0: J9.16 SWDIP.8
SWDIP1: J9.15 SWDIP.7
SWDIP2: J9.14 SWDIP.6
SWDIP3: J9.13 SWDIP.5
VBAT: J11.2 Rbufb1.2
VCC: PTbuf_U_PT_Buffer1.8 PTbuf_U_PT_Buffer2.8 PTbuf_U_PT_Buffer3.8
VCC1: J2.5 J2.6 J2.7 J21.1
VCC2: J21.2 SWspw.1
VCC3: J21.3 SLED.1
VCC4: J20.1 Rref1.2
VCC5: J1.5 J1.6 J1.7 J20.2
VCC6: J20.3
VCC_S: Dbufb1.2 Dms1.2 PTr1_U_PT_Sensor1.2 PTr1_U_PT_Sensor2.2 PTr1_U_PT_Sensor3.2 PTr1_U_PT_Sensor4.2 PTr1_U_PT_Sensor5.2 PTr1_U_PT_Sensor6.2 PTr2_U_PT_Sensor1.2 PTr2_U_PT_Sensor2.2 PTr2_U_PT_Sensor3.2 PTr2_U_PT_Sensor4.2 PTr2_U_PT_Sensor5.2 PTr2_U_PT_Sensor6.2 PTr3_U_PT_Sensor1.2 PTr3_U_PT_Sensor2.2 PTr3_U_PT_Sensor3.2 PTr3_U_PT_Sensor4.2 PTr3_U_PT_Sensor5.2 PTr3_U_PT_Sensor6.2 RLED?.2 SWspw.2
VREF: CDC.1 J10.6 J10.7 Jbufa.1 Sms.2
pads on no net: BT1.1 BT1.2 J3.1 J4.1 J7.1 J7.2 J7.3 J7.4 J7.5 J8.1 J8.2 J8.3 J8.4 J8.5 J9.9 J9.17 J9.18 J9.19 J9.20 J9.21 J9.22 J9.25 J9.26 J10.1 J10.2 J10.26 J12.1 J12.2 J16.1 J16.2 J16.3 J16.4 J16.5 J16.6 J17.1 J17.2 J17.3 J17.4 J17.5 J17.6 J18.1 J19.1 J22.2 J23.2 Sms.3

## Keep-outs
Keep-Out Layer:
  lines w10: -1730,-2500 -1730,2500 1730,2500 1730,-2500 -1730,-2500

## Silkscreen, mask and mechanical layers (free items; w line width, h text height)
Top Overlay:
  text "Front" at -228.11,2113.31 h100
  text "Put your design here" at -920,1620 h100
  text "-" at -1350,1430 h60
  text "+" at -1345,1335 h60
  text "M-" at 1295,1305 h40
  text "GND" at -590,1230 h40
  text "VDIO" at 455,1220 h40
  text "ChA" at 1265,1200 h40
  text "Vbat" at -1360,1195 h40
  text "3.0" at -590,1130 h40
  text "GND" at 460,1110 h40
  text "GND" at 1260,1100 h40
  text "Ibat" at -1375,1055 h40
  text "+5V" at 1260,1035 h40
  text "3.1" at -590,1030 h40
  text "1.7" at 465,1030 h40
  text "3.2" at -590,930 h40
  text "1.6" at 465,930 h40
  text "ChB" at 1265,870 h40
  text "D1" at -1370,855 h40
  text "1.5" at 465,835 h40
  text "3.3" at -590,830 h40
  text "M+" at 1300,805 h40
  text "IN2" at -1375,755 h40
  text "3.4" at -590,730 h40
  text "1.4" at 465,730 h40
  text "IN1" at -1375,655 h40
  text "3.5" at -590,630 h40
  text "1.3" at 465,630 h40
  text "SLW" at -1380,565 h40
  text "1.2" at 465,535 h40
  text "3.6" at -590,530 h40
  text "INV" at -1375,465 h40
  text "3.7" at -590,430 h40
  text "1.1" at 465,430 h40
  text "D2" at 1295,415 h40
  text "EN" at -1370,370 h40
  text "15.0" at -595,330 h40
  text "1.0" at 465,330 h40
  text "EN" at 1290,310 h40
  text "D2" at -1370,260 h40
  text "15.1" at -590,230 h40
  text "12.0" at 465,230 h40
  text "INV" at 1270,220 h40
  text "12.1" at 465,135 h40
  text "15.2" at -595,130 h40
  text "SLW" at 1270,105 h40
  text "15.3" at -595,30 h40
  text "12.2" at 465,25 h40
  text "IN1" at 1285,15 h40
  text "15.4" at -595,-70 h40
  text "12.3" at 465,-70 h40
  text "IN2" at 1270,-90 h40
  text "M+" at -1365,-130 h40
  text "15.5" at -595,-170 h40
  text "12.4" at 465,-170 h40
  text "D1" at 1305,-210 h40
  text "ChB" at -1370,-230 h40
  text "0.0" at -590,-270 h40
  text "12.5" at 465,-270 h40
  text "+5V" at -1370,-325 h40
  text "0.1" at -590,-370 h40
  text "12.6" at 465,-370 h40
  text "GND" at -1365,-430 h40
  text "0.2" at -590,-470 h40
  text "12.7" at 465,-470 h40
  text "ChA" at -1365,-530 h40
  text "0.3" at -590,-570 h40
  text "2.7" at 465,-570 h40
  text "M-" at -1365,-625 h40
  text "0.4" at -590,-670 h40
  text "2.6" at 465,-670 h40
  text "0.5" at -590,-770 h40
  text "2.5" at 465,-770 h40
  text "0.6" at -590,-870 h40
  text "2.4" at 465,-875 h40
  text "0.7" at -590,-970 h40
  text "2.3" at 465,-970 h40
  text "RST" at -590,-1070 h40
  text "2.2" at 465,-1070 h40
  text "GND" at -590,-1135 h40
  text "2.1" at 465,-1170 h40
  text "2.0" at 465,-1270 h40
  text "-" at 1320,-1280 h60 r180
  text "VDD" at -590,-1305 h40
  text "+" at 1330,-1415 h60 r90
  text "Don't delete any LED & hole" at -1270,-1620 h100

## Text inside footprints (layer, text, board x,y; h text height)
CDC: Top Overlay "+" at 6806.89,-581.69 h59.06
SWr_U_PT_Sensor1: Top Overlay "1" at 9951.89,813.31 h50 r90; Top Overlay "5" at 9951.89,1153.31 h50 r90; Top Overlay "6" at 9851.89,1153.31 h50 r90
SWr_U_PT_Sensor2: Top Overlay "1" at 10011.89,1493.31 h50 r90; Top Overlay "5" at 10011.89,1833.31 h50 r90; Top Overlay "6" at 9911.89,1833.31 h50 r90
SWr_U_PT_Sensor3: Top Overlay "1" at 10011.89,2173.31 h50 r90; Top Overlay "5" at 10011.89,2513.31 h50 r90; Top Overlay "6" at 9911.89,2513.31 h50 r90
SWr_U_PT_Sensor4: Top Overlay "1" at 10011.89,2853.31 h50 r90; Top Overlay "5" at 10011.89,3193.31 h50 r90; Top Overlay "6" at 9911.89,3193.31 h50 r90
SWr_U_PT_Sensor5: Top Overlay "1" at 10011.89,3533.31 h50 r90; Top Overlay "5" at 10011.89,3873.31 h50 r90; Top Overlay "6" at 9911.89,3873.31 h50 r90
SWr_U_PT_Sensor6: Top Overlay "1" at 10011.89,4213.31 h50 r90; Top Overlay "5" at 10011.89,4553.31 h50 r90; Top Overlay "6" at 9911.89,4553.31 h50 r90